# EAGLE board heatingHeader (EAGLE 6.3)

Size 45.39 x 30.47 mm. Coordinates in mm from the lower left corner, seen from the top.
Outline: 0,0 45.39,0 45.39,30.47 0,30.47 0,0
Copper layers (1*16): Top 0.035mm / dielectric 1.5mm / Bottom 0.035mm
Design rules "default": minimum track width 10mil, minimum drill 24mil, track to track 8mil, track to pad 8mil, pad to pad 8mil, via to via 8mil, smd to smd 8mil, copper to edge 40mil, drill to drill 8mil, minimum pad ring 10mil, minimum via ring 8mil, stop-mask expansion 4mil, vias tented up to drill 0mil, thermal gap 10mil

## Footprints (pad centres in the part's own frame; a part is rotated, then mirrored left to right if it is on the bottom)
SMA = smd 2 x 2: A 2,0; C -2,0
TO-92 = drill 0.813 pad 1.27 octagon: 1 -1.27,0; 2 0,1.905; 3 1.27,0
1X05 = drill 1.016 long: 1 -5.08,0; 2 -2.54,0; 3 0,0; 4 2.54,0; 5 5.08,0
5-2,5 = smd 2.54 x 5.08: 1 0,0
R1206 = smd 1.6 x 1.803: 1 -1.422,0; 2 1.422,0
SD4-01 = drill 0.813 long: 1 0,-3.81; 2 0,3.81
SOT23-BEC = smd 1 x 1.4: B -0.95,-1.1; C 0,1.1; E 0.95,-1.1
RFM70 = smd 0.85 x 1.5: CE 2.5,-14.3; CSN 3.8,-14.3; GND -0.1,-14.3; IRQ 9,-14.3; MISO 7.7,-14.3; MOSI 6.4,-14.3; SCK 5.1,-14.3; VDD 1.2,-14.3
SSOP20 = smd 0.4 x 1.5: 1 -2.925,-3.625; 2 -2.275,-3.625; 3 -1.625,-3.625; 4 -0.975,-3.625; 5 -0.325,-3.625; 6 0.325,-3.625; 7 0.975,-3.625; 8 1.625,-3.625; 9 2.275,-3.625; 10 2.925,-3.625; 11 2.925,3.625; 12 2.275,3.625; 13 1.625,3.625; 14 0.975,3.625; 15 0.325,3.625; 16 -0.325,3.625; 17 -0.975,3.625; 18 -1.625,3.625; 19 -2.275,3.625; 20 -2.925,3.625

## Placement (x,y rotation side)
D1  MBRA340T3  [SMA]  -48.26,5.08 0 top  (outside the outline)
D2  MBRA340T3  [SMA]  -21.59,21.59 0 top  (outside the outline)
D3  MBRA340T3  [SMA]  -33.02,21.59 0 top  (outside the outline)
D4  MBRA340T3  [SMA]  -44.45,21.59 0 top  (outside the outline)
IC1  DS1820  [TO-92]  33.02,2.54 0 bottom
JP2  Prog  [1X05]  40.64,15.24 90 bottom
PAD1  WIREPADSMD5-2,5  [5-2,5]  2.54,26.67 0 top
PAD2  WIREPADSMD5-2,5  [5-2,5]  43.18,26.67 0 top
PAD3  WIREPADSMD5-2,5  [5-2,5]  43.18,3.81 0 bottom
PAD4  WIREPADSMD5-2,5  [5-2,5]  38.1,3.81 0 bottom
PAD5  WIREPADSMD5-2,5  [5-2,5]  27.94,3.81 0 bottom
PAD6  WIREPADSMD5-2,5  [5-2,5]  20.32,3.81 0 bottom
PAD7  WIREPADSMD5-2,5  [5-2,5]  24.13,3.81 0 bottom
R1  1K  [R1206]  -38.1,36.83 0 top  (outside the outline)
R2  1K  [R1206]  -43.18,36.83 0 top  (outside the outline)
R3  1K  [R1206]  -48.26,36.83 0 top  (outside the outline)
R4  1K  [R1206]  -15.24,43.18 0 top  (outside the outline)
R5  1K  [R1206]  -20.32,43.18 0 top  (outside the outline)
R7  100 K  [R1206]  -33.02,36.83 0 top  (outside the outline)
S1  [SD4-01]  21.59,16.51 0 top
T1  [SOT23-BEC]  -30.48,43.18 0 top  (outside the outline)
T2  [SOT23-BEC]  -35.56,43.18 0 top  (outside the outline)
T3  [SOT23-BEC]  -40.64,43.18 0 top  (outside the outline)
T4  [SOT23-BEC]  -45.72,43.18 0 top  (outside the outline)
U$1  RFM70  [RFM70]  6.35,-5.08 180 bottom
U$2  PIC16F690  [SSOP20]  31.75,15.24 180 bottom

## Library data of the parts
D1-D4 = diode
IC1 = ds1820
JP2 = pinhead
PAD1-PAD7 = wirepad
R1-R5 R7 = resistor
S1 = switch-dil; OC_FARNELL: unknown; OC_NEWARK: unknown
T1-T4 = transistor
U$1 = rfm70
U$2 = microchip

## Nets
N$1: IC1.2 U$2.8
N$2: D3.C D4.C JP2.2 PAD1.1 T3.E T4.E U$1.VDD U$2.1 U$2.7
N$3: IC1.3 U$2.15
N$4: PAD5.1 R5.1
N$5: D1.A D2.A IC1.1 JP2.3 PAD2.1 PAD7.1 S1.1 T1.E T2.E U$1.GND U$2.20
N$6: U$1.MISO U$2.13
N$7: D2.C D4.A PAD3.1 T2.C T3.C
N$8: D1.C D3.A PAD4.1 T1.C T4.C
N$9: PAD6.1 R7.1 U$2.2
N$10: S1.2 U$2.3
N$13: R2.2 T2.B
N$14: R4.1 T3.B
N$16: U$1.CE U$2.17
N$18: JP2.4 U$2.19
N$19: JP2.5 U$2.18
N$20: U$1.CSN U$2.16
N$21: U$1.IRQ U$2.14
N$22: U$1.SCK U$2.11
N$23: U$1.MOSI U$2.9
N$24: R1.2 T1.B
N$25: JP2.1 U$2.4
N$27: R3.1 T4.B
N$28: R5.2 R7.2 U$2.12
N$30: R1.1 R3.2 U$2.6
N$31: R2.1 R4.2 U$2.5

## Tracks (layer width: path | path; a pad name or v marks a point on that pad's centre or on a via)
N$1  (1 unrouted)
N$2  (8 unrouted)
N$3  (1 unrouted)
N$4  (1 unrouted)
N$5  (10 unrouted)
N$6  (1 unrouted)
N$7  (4 unrouted)
N$8  (4 unrouted)
N$9  (2 unrouted)
N$10  (1 unrouted)
N$13  (1 unrouted)
N$14  (1 unrouted)
N$16  (1 unrouted)
N$18  (1 unrouted)
N$19  (1 unrouted)
N$20  (1 unrouted)
N$21  (1 unrouted)
N$22  (1 unrouted)
N$23  (1 unrouted)
N$24  (1 unrouted)
N$25  (1 unrouted)
N$27  (1 unrouted)
N$28  (2 unrouted)
N$30  (2 unrouted)
N$31  (2 unrouted)